# Altium PCB PCB1.PcbDoc
Units mm, origin at the board's own origin, x right, y up, seen from the top; angles counter-clockwise.
Board outline 91.67 x 34.05 mm, 2 copper layers (Top Layer, Bottom Layer), stack 1.671 mm thick; 22 components, 32 nets, 107 pads, 1 vias.
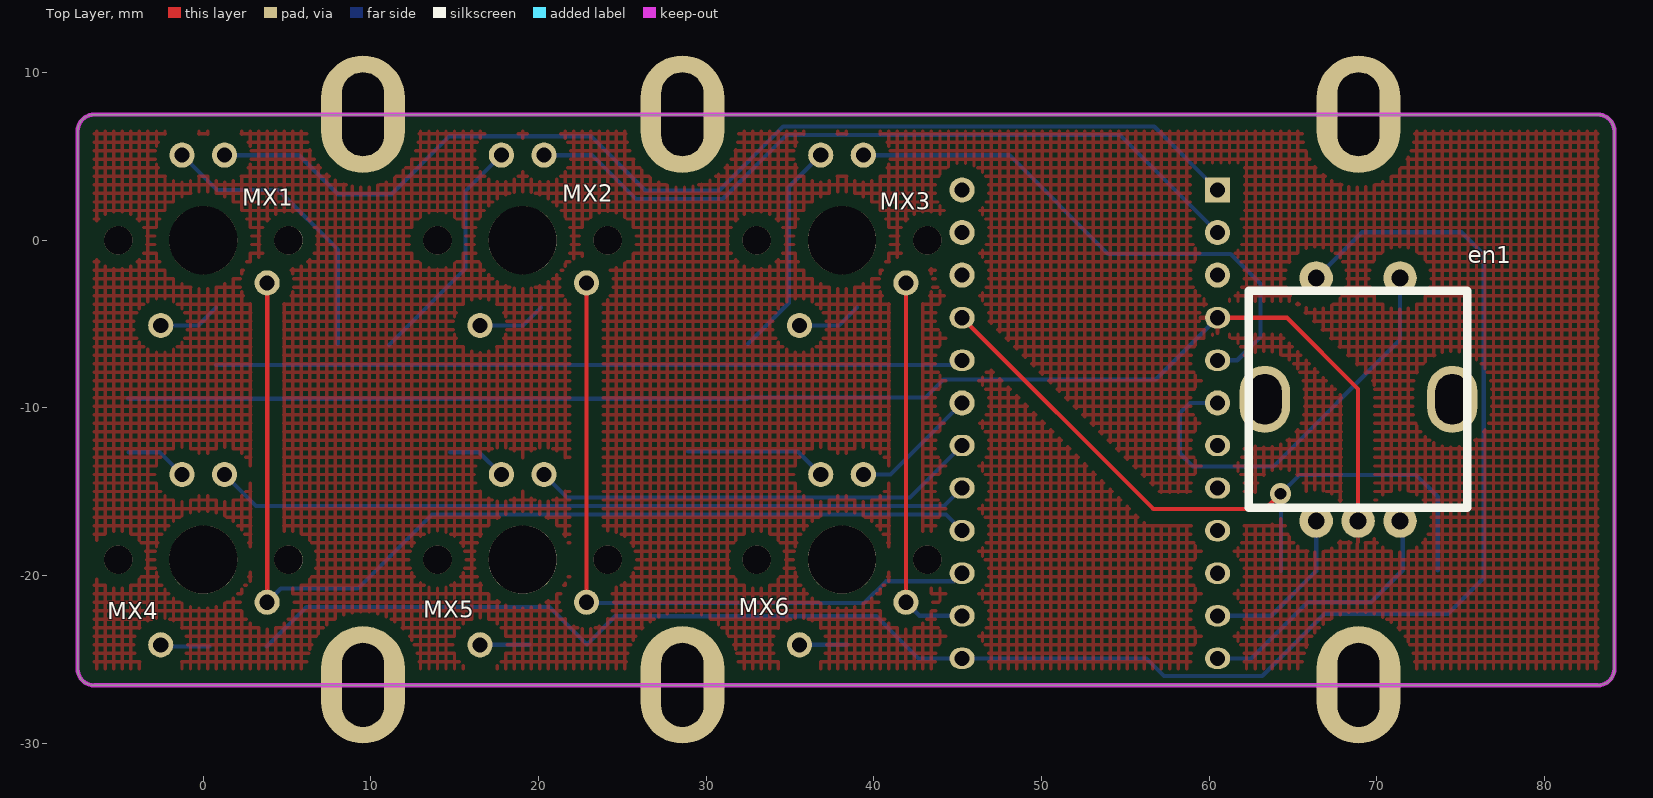
[diagram p0: Top Layer view]
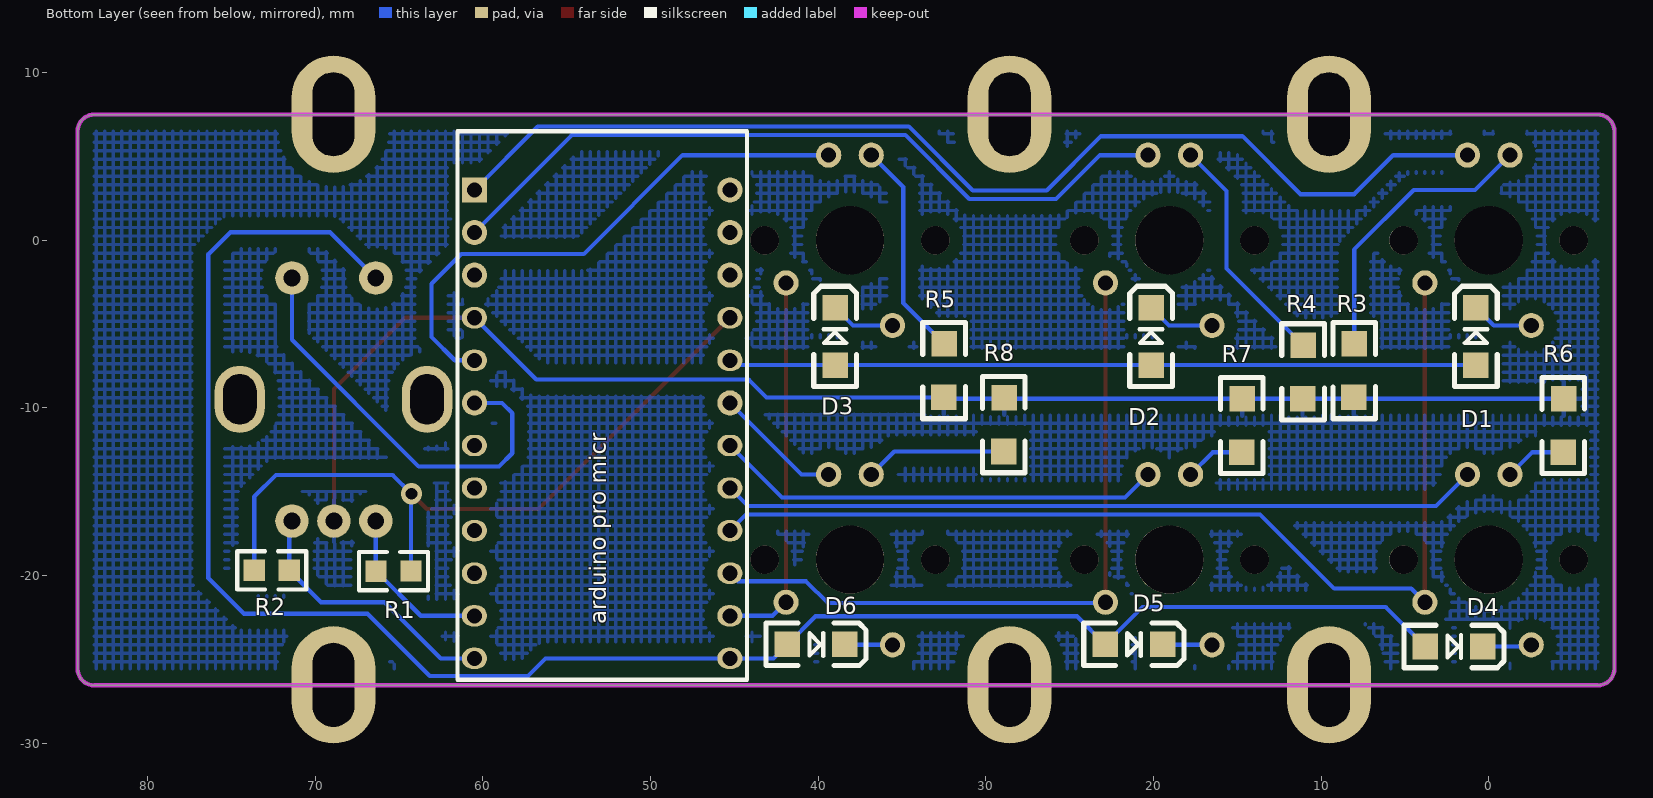
[diagram p1: Bottom Layer view, seen from below]
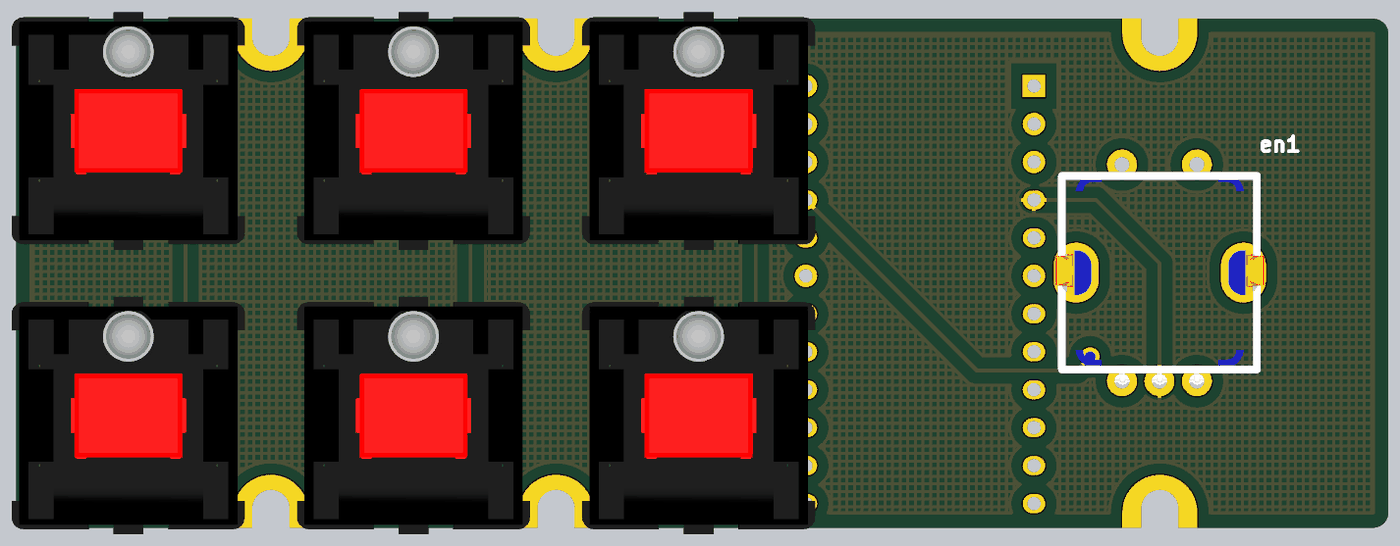
[diagram p2: 3D render of the assembled board from above, using the file's embedded part models]
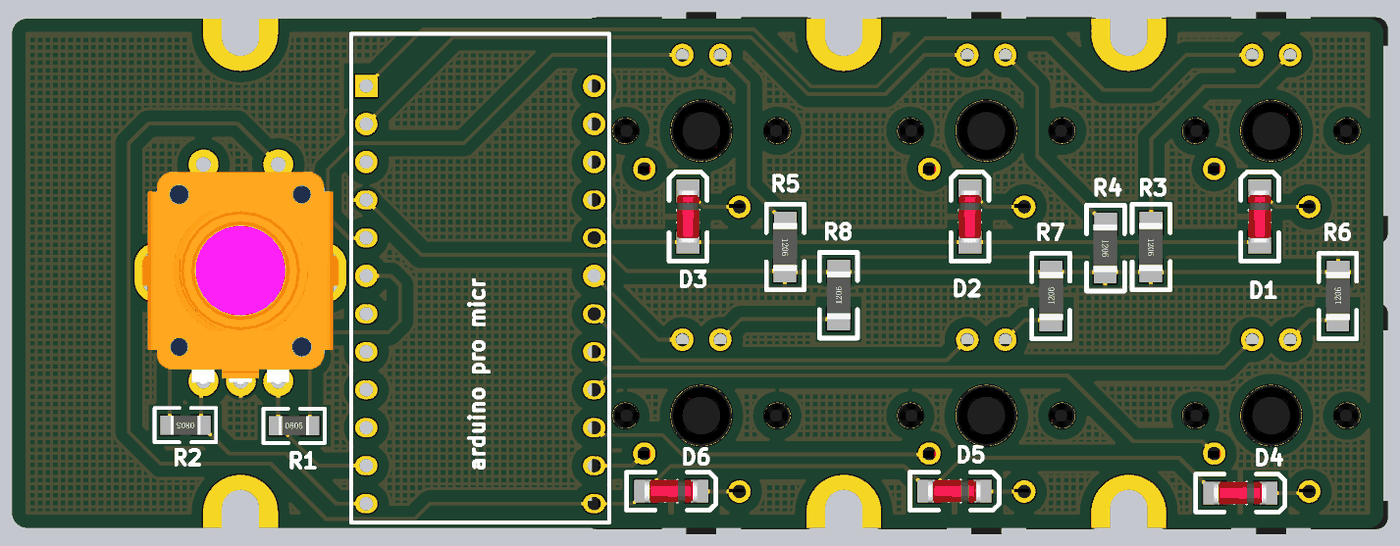
[diagram p3: 3D render of the assembled board from below, using the file's embedded part models]

## Layer stack, top to bottom
Top Solder: solder mask 0.0102, Solder Resist, Dk 3.5
Top Layer: signal copper 0.0356
Dielectric 1: dielectric 1.6, FR-4, Dk 4.8
Bottom Layer: signal copper 0.0356
Bottom Solder: solder mask 0.0102, Solder Resist, Dk 3.5

## Board outline
-6.5,-26.55 cw(c-6.5,-25.55) -7.5,-25.55 -7.5,6.5 cw(c-6.5,6.5) -6.5,7.5 83.175,7.5 cw(c83.175,6.5) 84.175,6.5 84.175,-25.55 cw(c83.175,-25.55) 83.175,-26.55

## Design rules (kind name [scope] priority, off if disabled: settings)
Clearance [All] p1: gap=0.254
ComponentClearance [All] p1 off: gap=0.254 collisioncheckmode=3 verticalgap=0.254 showdistances=FALSE
PolygonConnect [All] p1: connectstyle=Relief reliefconductorwidth=0.254 reliefentries=4 polygonreliefangle="90 Angle" airgapwidth=0.254
RoutingVias [All] p1: holewidth=0.711 width=1.27 viastyle="Through Hole" minholewidth=0.711 minwidth=1.27 maxholewidth=0.711 maxwidth=1.27
SolderMaskExpansion [All] p1: expansion=0.102
Width [All] p1: maxlimit=0.254 minlimit=0.254 preferedwidth=0.254
29 further rules are at their usual default settings.

## Components (designator, comment, footprint, x,y, rotation, side; value= is the part's Value field where it differs from the comment)
"arduino pro micr" "arduino pro micro" "arduino pro micro" 60.503,3 r180 bottom
D1 "" D1206 0.686,-5.639 r90 bottom
D2 "" D1206 20.066,-5.639 r90 bottom
D3 "" D1206 38.913,-5.639 r90 bottom
D4 "" D1206 1.981,-24.308 r180 bottom
D5 "" D1206 21.082,-24.181 r180 bottom
D6 "" D1206 40.03,-24.181 r180 bottom
en1 "encoder" "RES ADJ-EC12" 68.91,-9.5 r0 top
MX1 "" MX_SW-5 0,0 r180 top
MX2 "" MX_SW-5 19.05,0 r180 top
MX3 "" MX_SW-5 38.1,0 r180 top
MX4 "" MX_SW-5 0,-19.05 r180 top
MX5 "" MX_SW-5 19.05,-19.05 r180 top
MX6 "" MX_SW-5 38.1,-19.05 r180 top
R1 "RES" R0805 66.37,-19.736 r180 bottom
R2 "RES" R0805 71.552,-19.685 r0 bottom
R3 "R" R1206 8.103,-7.976 r270 bottom
R4 "R" R1206 11.151,-8.052 r270 bottom
R5 "R" R1206 32.563,-7.976 r270 bottom
R6 "R" R1206 -4.521,-10.846 r90 bottom
R7 "R" R1206 14.656,-10.846 r90 bottom
R8 "R" R1206 28.854,-10.795 r90 bottom

## Footprints (in the part's own frame and the unit in brackets; to place one, negate y for a bottom-side part, rotate by r counter-clockwise, add the part's x,y. Pads: shape width x height; smd on the part's side, far side on the other; paste and mask are expansions set on the pad)
"arduino pro micro" [mm]
  rect 1.5x1.5 hole 0.9: 1(0,0)
  round 1.5 hole 0.9: 2(0,-2.54) 3(0,-5.08) 6(0,-12.7) 19(15.24,-12.7) 22(15.24,-5.08) 23(15.24,-2.54) 24(15.24,0)
  oval 1.5x1.27 hole 0.9: 4(0,-7.62) 5(0,-10.16) 7(0,-15.24) 8(0,-17.78) 9(0,-20.32) 10(0,-22.86) 11(0,-25.4) 12(0,-27.94) 13(15.24,-27.94) 14(15.24,-25.4) 15(15.24,-22.86) 16(15.24,-20.32) 17(15.24,-17.78) 18(15.24,-15.24) 20(15.24,-10.16) 21(15.24,-7.62)
  silkscreen extent -1.02,-29.21 16.26,3.5
D1206 [mil] "1/4W"
  rect 60x60 smd: 1(-71,3) 2(64,3)
  silkscreen extent -121,-47 114,53, body extent -73,-27 65,33, height 59
MX_SW-5 [mm] "with Fixation pins  1-Pole w/LED"
  round 1.5 hole 0.9: 1(-3.81,2.54) 2(2.54,5.08) 3(-1.27,-5.08) 4(1.27,-5.08)
  round 1.702 hole 1.702: ""(-5.08,0) ""(5.08,0)
  round 4.064 hole 4.064: ""(0,0)
  body extent -7.8,-7.96 7.8,7.96, height 14.9
R0805 [mm] "1/8W"
  rect 1.27x1.27 smd: 1(0,0) 2(2.09,0.005)
  silkscreen extent -1.01,-1.14 3.1,1.15, body extent 0.04,-0.62 2.04,0.64, height 0.55
R1206 [mil] "1/4W"
  rect 60x60 smd: 1(-71,3) 2(55,2)
  silkscreen extent -121,-47 105,53, body extent -71,-29 55,33, height 24
"RES ADJ-EC12" [mm] "编码器"
  oval 3x4 hole 2 slot 3 at 90 deg: 0(-5.588,0.014) 0(5.588,0.014)
  round 2 hole 1: 1(-2.525,-7.25) 2(-0.025,-7.25) 3(2.475,-7.25) 4(-2.525,7.25) 5(2.475,7.25)
  silkscreen extent -6.54,-6.46 6.49,6.49, body extent -7,-7.5 7,6.75, height 20.05

## Part data
D1 D2 D3 D4 D5 D6: library part D
MX1 MX2 MX3 MX4 MX5 MX6: library part MX_SW-7

## Free pads (board coordinates)
  oval 5x7 hole 2.5 slot 5.001 at 90 deg: 1(9.525,-26.518) 1(9.525,7.518) 1(28.575,-26.518) 1(28.575,7.518) 1(68.91,-26.518) 1(68.91,7.518)

## Via types
v1: diameter 1.27, hole 0.711, Top Layer to Bottom Layer, 1 vias

## Nets (pads, with @x,y where several pads share a name; then routed paths per layer and width w, separated by ;. In a path a pad name is that pad's centre, name@x,y a point inside that pad or via, vN(x,y) a via of type N, cw(c..) or ccw(c..) an arc to the next point about the centre after c; other vN are vias at no path point)
0: "arduino pro micr.2" MX2.3 | length 45.3
  Bottom Layer w0.254: MX2.3 23.19,5.08 25.806,2.464 30.988,2.464 34.798,6.274 54.689,6.274 60.503,0.46
1: "arduino pro micr.1" MX1.3 | length 66.1
  Bottom Layer w0.254: MX1.3 5.69,5.08 8.026,2.743 11.227,2.743 14.695,6.211 23.126,6.211 26.365,2.972 30.778,2.972 34.588,6.782 56.721,6.782 60.503,3
2: "arduino pro micr.5" MX3.3 | length 33.2
  Bottom Layer w0.254: MX3.3 48.082,5.08 53.975,-0.813 61.29,-0.813 63.068,-2.591 63.068,-5.766 61.674,-7.16 60.503,-7.16
3: "arduino pro micr.6" en1.5 | length 25.2
  Bottom Layer w0.254: 60.503,-9.7 58.855,-9.7 58.242,-10.312 58.242,-12.7 59.03,-13.487 63.83,-13.487 71.385,-5.933 en1.5
4: "arduino pro micr.7"
5: "arduino pro micr.8"
6: "arduino pro micr.9"
7: "arduino pro micr.10"
8: "arduino pro micr.11" en1.1 R1.1 | length 10
  Bottom Layer w0.254: 60.503,-22.4 63.706,-22.4 R1.1 66.385,-19.721 en1.1
9: "arduino pro micr.12" en1.3 R2.1 | length 16.2
  Bottom Layer w0.254: 60.503,-24.94 62.512,-24.94 65.862,-21.59 69.647,-21.59 R2.1 71.552,-16.917 en1.3
10: "arduino pro micr.13" D4.1 D5.1 D6.1 en1.4 | length 110.1
  Bottom Layer w0.254: D4.1 6.147,-21.869 20.65,-21.869 D5.1 24.562,-22.428 40.157,-22.428 D6.1 42.669,-24.94 45.263,-24.94 56.258,-24.94 57.302,-25.984 63.17,-25.984 66.878,-22.276 74.244,-22.276 76.378,-20.142 76.378,-16.256 76.379,-16.255 76.379,-0.84 75.057,0.483 69.117,0.483 en1.4
14: "arduino pro micr.15" MX2.1 MX5.1 | length 42.2
  Top Layer w0.254: MX5.1 MX2.1
  Bottom Layer w0.254: MX5.1 22.911,-21.641 39.421,-21.641 40.716,-20.345 44.777,-20.345 45.263,-19.86
15: "arduino pro micr.16" MX1.1 MX4.1 | length 63.1
  Top Layer w0.254: MX4.1 MX1.1
  Bottom Layer w0.254: MX4.1 4.623,-20.777 9.22,-20.777 13.64,-16.358 44.3,-16.358 45.263,-17.32
16: "arduino pro micr.14" MX3.1 MX6.1 | length 22.7
  Top Layer w0.254: MX6.1 MX3.1
  Bottom Layer w0.254: MX6.1 42.72,-22.4 45.263,-22.4
A0: "arduino pro micr.17" MX4.3 | length 45.2
  Bottom Layer w0.254: MX4.3 3.15,-15.85 44.193,-15.85 45.263,-14.78
A1: "arduino pro micr.18" MX5.3 | length 26.8
  Bottom Layer w0.254: MX5.3 21.692,-15.342 42.161,-15.342 45.263,-12.24
A2: "arduino pro micr.19" MX6.3 | length 7.7
  Bottom Layer w0.254: MX6.3 40.993,-13.97 45.263,-9.7
A3: "arduino pro micr.20" D1.1 D2.1 D3.1 | length 44.6
  Bottom Layer w0.254: D1.1 D2.1 D3.1 44.981,-7.442 45.263,-7.16
GND: "arduino pro micr.4" en1.2 R3.2 R4.2 R5.2 R6.2 R7.2 R8.2 | length 85
  Top Layer w0.254: 60.503,-4.62 64.64,-4.62 68.885,-8.865 en1.2
  Bottom Layer w0.254: R6.2 R7.2 32.436,-9.449 R5.2 43.079,-9.372 44.145,-8.306 56.817,-8.306 60.503,-4.62
NetD1_2: D1.2 MX1.2 | length 3.7
  Bottom Layer w0.254: MX1.2 -0.305,-5.08 D1.2
NetD2_2: D2.2 MX2.2 | length 4.1
  Bottom Layer w0.254: MX2.2 19.075,-5.08 D2.2
NetD3_2: D3.2 MX3.2 | length 3.9
  Bottom Layer w0.254: MX3.2 37.922,-5.08 D3.2
NetD4_2: D4.2 MX4.2 | length 2.9
  Bottom Layer w0.254: MX4.2 -2.438,-24.232 D4.2
NetD5_2: D5.2 MX5.2 | length 3
  Bottom Layer w0.254: MX5.2 19.431,-24.13 D5.2
NetD6_2: D6.2 MX6.2 | length 2.9
  Bottom Layer w0.254: MX6.2 38.379,-24.13 D6.2
NetMX1_4: MX1.4 R3.1 | length 17.2
  Bottom Layer w0.254: MX1.4 0.813,2.997 4.47,2.997 8.026,-0.559 R3.1
NetMX2_4: MX2.4 R4.1 | length 14.1
  Bottom Layer w0.254: R4.1 15.646,-1.676 15.646,2.946 MX2.4
NetMX3_4: MX3.4 R5.1 | length 13.1
  Bottom Layer w0.254: R5.1 34.925,-3.734 34.925,3.175 MX3.4
NetMX4_4: MX4.4 R6.1 | length 3.7
  Bottom Layer w0.254: R6.1 -2.591,-12.649 MX4.4
NetMX5_4: MX5.4 R7.1 | length 3.6
  Bottom Layer w0.254: R7.1 16.459,-12.649 MX5.4
NetMX6_4: MX6.4 R8.1 | length 8.5
  Bottom Layer w0.254: R8.1 35.458,-12.598 MX6.4
VCC: "arduino pro micr.21" R1.2 R2.2 | length 43.5
  Top Layer w0.254: 45.263,-4.62 56.67,-16.027 63.348,-16.027 v1(64.254,-15.121)
  Bottom Layer w0.254: R1.2 64.28,-15.146 v1(64.254,-15.121) 65.38,-13.995 72.339,-13.995 73.642,-15.298 R2.2
pads on no net: "arduino pro micr.3" "arduino pro micr.22" "arduino pro micr.23" "arduino pro micr.24" en1.0 MX1. MX2. MX3. MX4. MX5. MX6.

## Polygon pours and split planes (outlines as drawn)
GND on Bottom Layer "Bottom Layer-No Net" (hatched 90Degree grid 0.508 track 0.203, pour order 2): -7.5,6.5 -6.5,7.5 83.175,7.5 84.175,6.5 84.175,-25.55 83.175,-26.55 -6.5,-26.55 -7.5,-25.55
GND on Top Layer "Bottom Layer-No Net" (hatched 90Degree grid 0.508 track 0.203, pour order 4): -7.5,6.5 -6.5,7.5 83.175,7.5 84.175,6.5 84.175,-25.55 83.175,-26.55 -6.5,-26.55 -7.5,-25.55

## Keep-outs
Keep-Out Layer:
  the board outline again, w0.254